# Altium PCB Legendre_SallenKey_PCB.PcbDoc
Units mm, origin at the board's own origin, x right, y up, seen from the top; angles counter-clockwise.
Board outline 37.57 x 49.43 mm, 2 copper layers (Top Layer, Bottom Layer); 33 components, 20 nets, 72 pads, 0 vias.
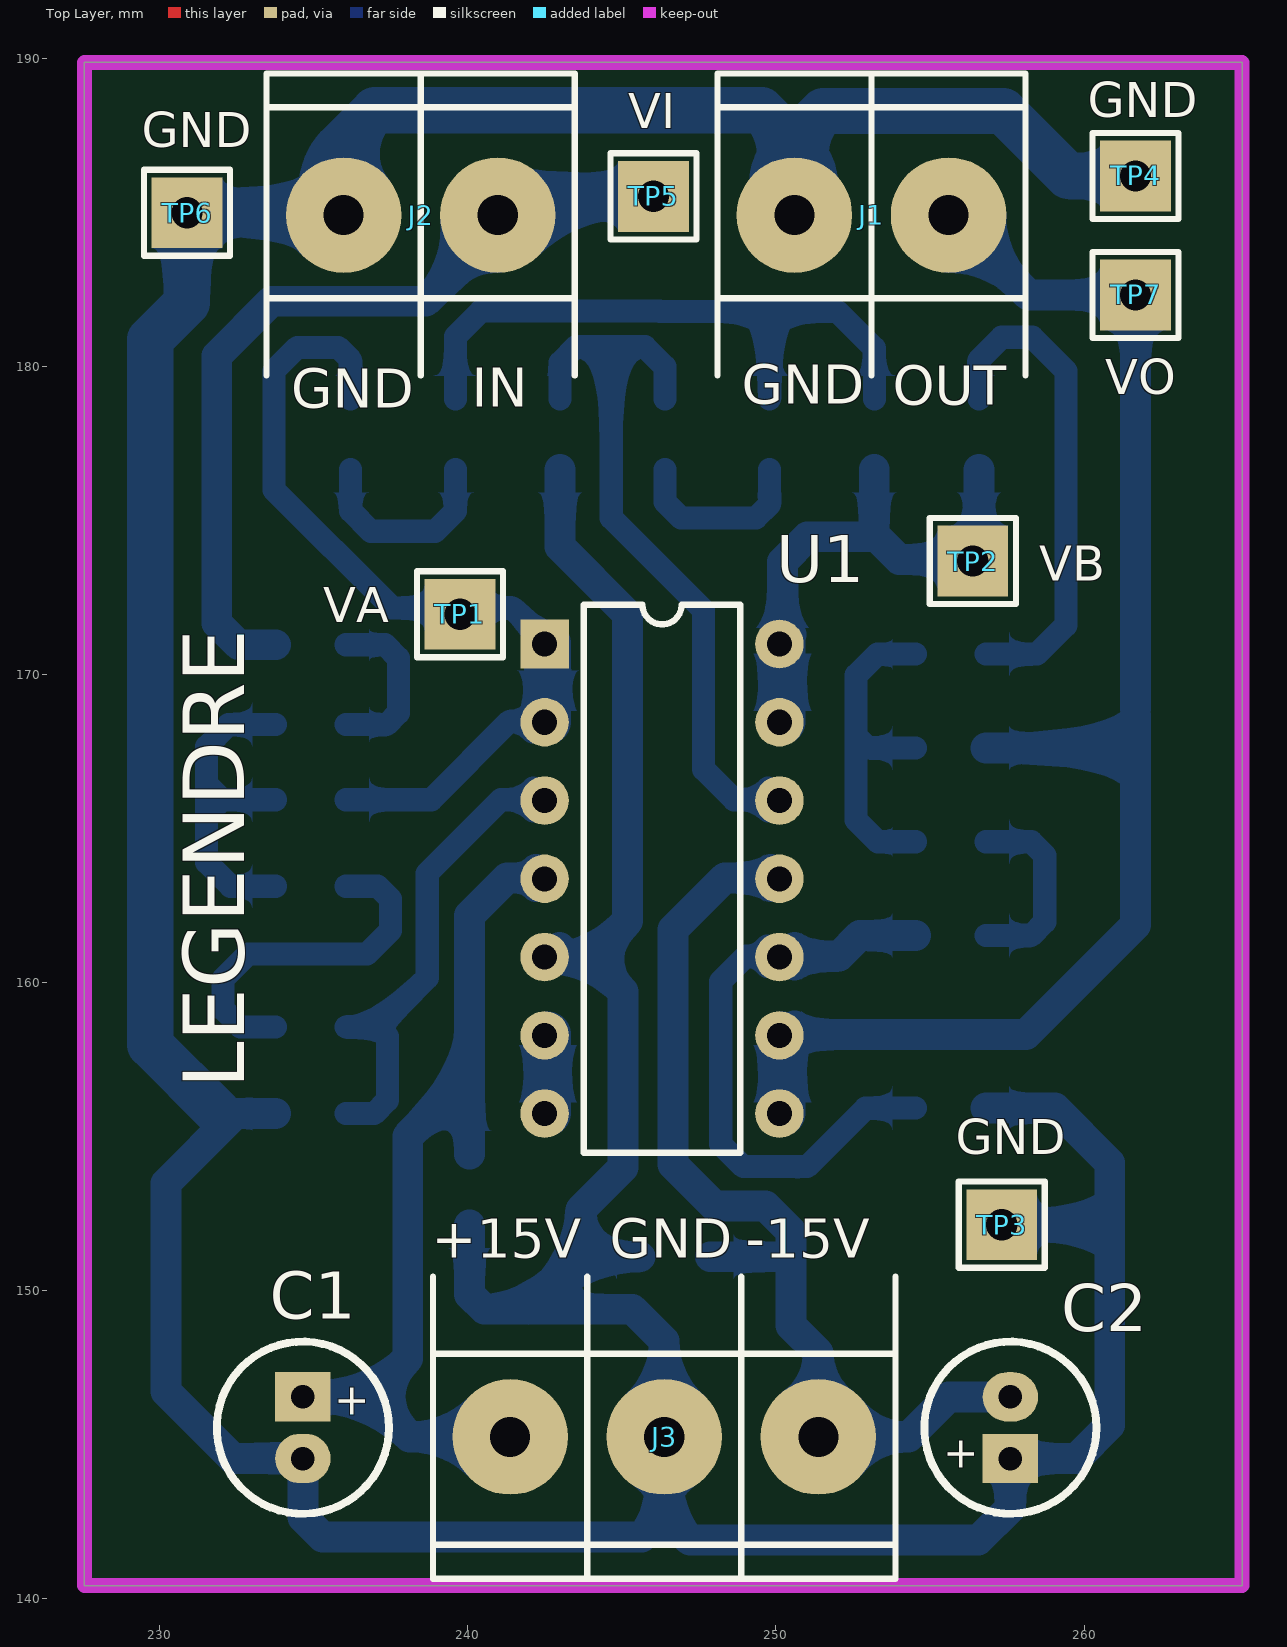
[diagram p0: Top Layer view]
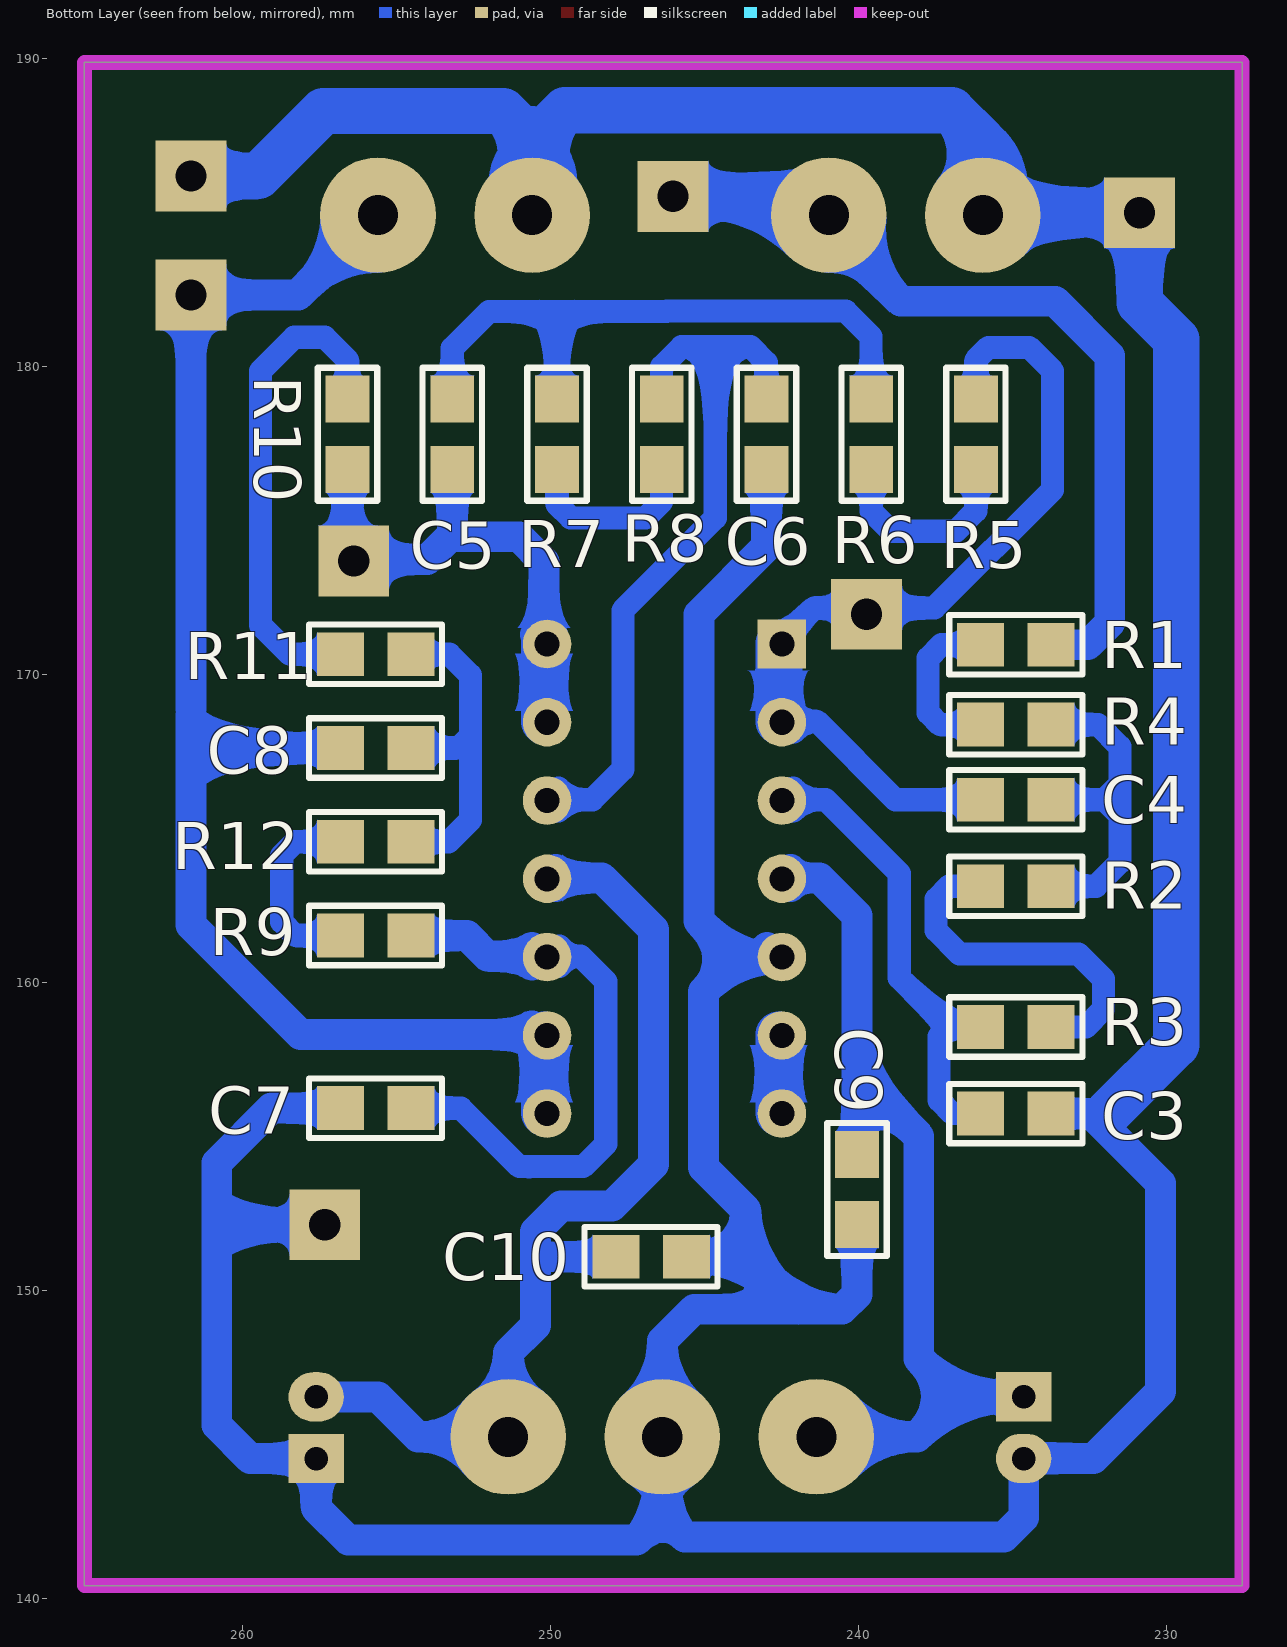
[diagram p1: Bottom Layer view, seen from below]
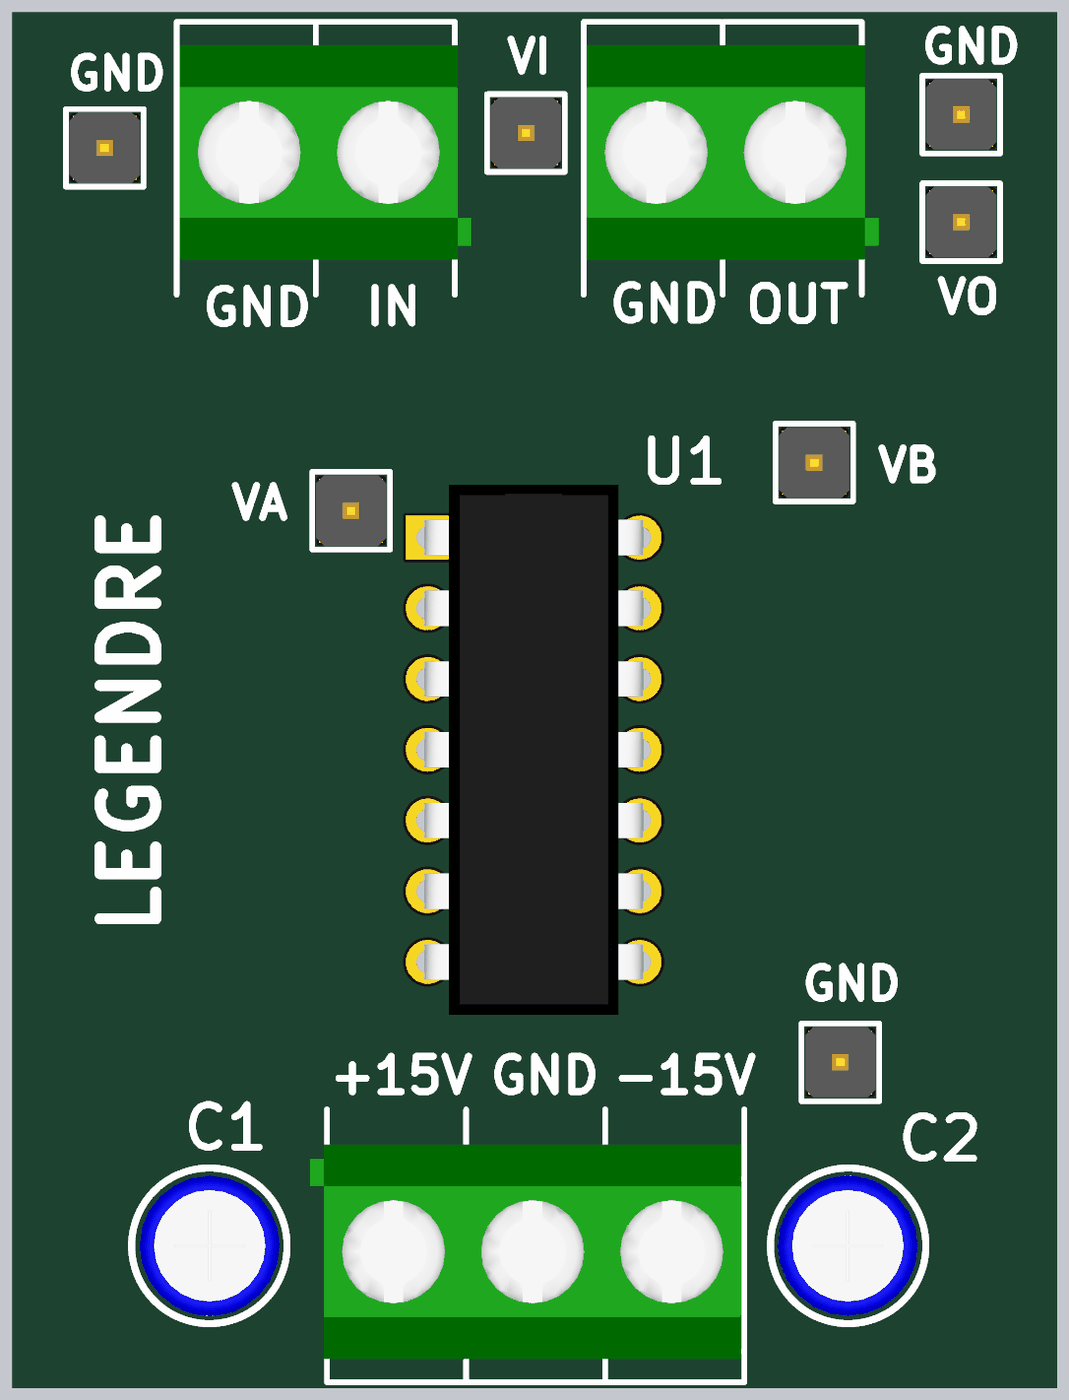
[diagram p2: 3D render of the assembled board from above, using the file's embedded part models]
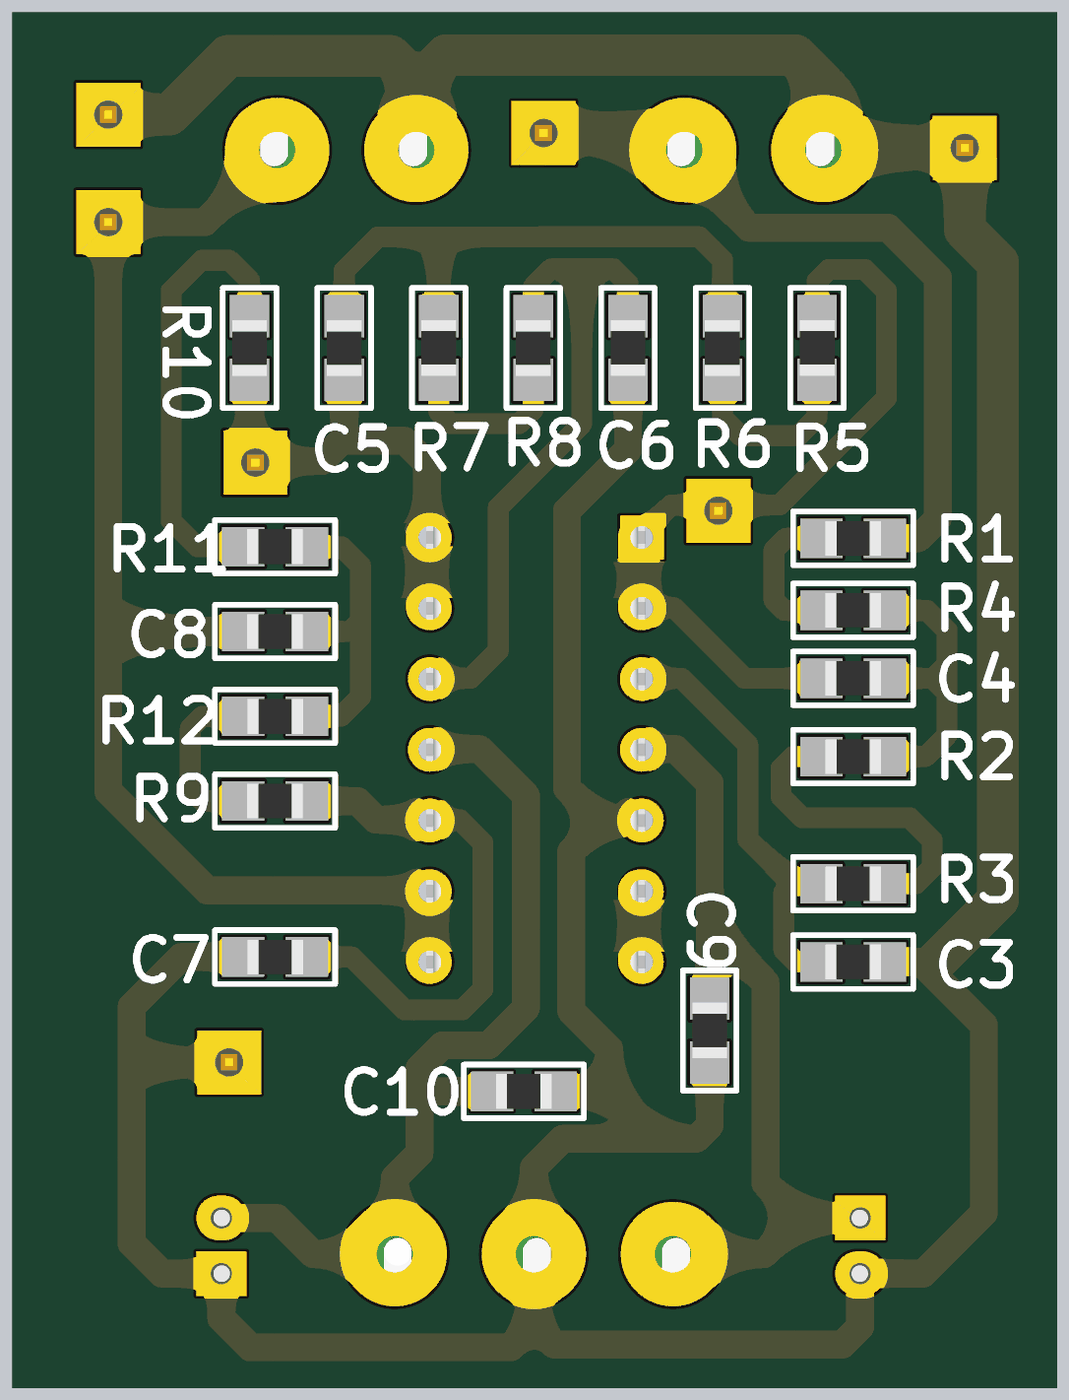
[diagram p3: 3D render of the assembled board from below, using the file's embedded part models]

## Layer stack, top to bottom
Top Solder: solder mask 0.0102, Solder Resist, Dk 3.5
Top Layer: signal copper 0.0356
Dielectric 1: dielectric 0.32, FR-4, Dk 4.8
Bottom Layer: signal copper 0.0356
Bottom Solder: solder mask 0.0102, Solder Resist, Dk 3.5

## Board outline
227.559,140.437 265.125,140.437 265.125,189.865 227.559,189.865

## Design rules (kind name [scope] priority, off if disabled: settings)
Clearance [All] p1: gap=0.4
PolygonConnect [All] p1: connectstyle=Relief reliefconductorwidth=0.254 reliefentries=4 polygonreliefangle="90 Angle" airgapwidth=0.254
RoutingVias [All] p1: holewidth=0.711 width=1.27 viastyle="Through Hole" minholewidth=0.711 minwidth=1.27 maxholewidth=0.711 maxwidth=1.27
SolderMaskExpansion [All] p1: expansion=0.102
Width [All] p1: maxlimit=1.5 minlimit=0.75 preferedwidth=1
30 further rules are at their usual default settings.

## Components (designator, comment, footprint, x,y, rotation, side; value= is the part's Value field where it differs from the comment)
C1 "10uF" CAP100RP 234.645,145.558 r270 top
C2 "10uF" CAP100RP 257.607,145.558 r90 top
C3 "CAP" 0805 234.899,155.753 r180 bottom
C4 "CAP" 0805 234.899,165.938 r180 bottom
C5 "CAP" 0805 253.191,177.8 r90 bottom
C6 "CAP" 0805 242.993,177.8 r270 bottom
C7 "CAP" 0805 255.676,155.931 r0 bottom
C8 "CAP" 0805 255.676,167.618 r180 bottom
C9 "100nF" 0805 240.055,153.289 r270 bottom
C10 "100nF" 0805 246.736,151.105 r180 bottom
J1 "BORNERA 2" BORNERA2 253.1,184.912 r270 top
J2 "BORNERA 2" BORNERA2 238.47,184.912 r270 top
J3 "BORNERA 3" BORNERA3 246.374,145.258 r90 top
R1 "RES" 0805 234.899,170.967 r0 bottom
R2 "RES" 0805 234.899,163.129 r0 bottom
R3 "RES" 0805 234.899,158.562 r0 bottom
R4 "RES" 0805 234.899,168.377 r180 bottom
R5 "RES" 0805 236.195,177.8 r270 bottom
R6 "RES" 0805 239.594,177.8 r90 bottom
R7 "RES" 0805 249.792,177.8 r270 bottom
R8 "RES" 0805 246.393,177.8 r90 bottom
R9 "RES" 0805 255.676,161.53 r180 bottom
R10 "RES" 0805 256.591,177.8 r90 bottom
R11 "RES" 0805 255.676,170.663 r180 bottom
R12 "RES" 0805 255.676,164.574 r0 bottom
TP1 "VA" TPTH 239.743,171.958 r90 top
TP2 "VB" TPTH 256.388,173.685 r90 top
TP3 "GND" TPTH 257.327,152.146 r90 top
TP4 "GND" TPTH 261.671,186.182 r90 top
TP5 "VI" TPTH 246.024,185.522 r90 top
TP6 "GND" TPTH 230.886,184.988 r90 top
TP7 "VO" TPTH 261.671,182.321 r90 top
U1 "TL084N" DIP14 242.494,170.993 r0 top

## Footprints (in the part's own frame and the unit in brackets; to place one, negate y for a bottom-side part, rotate by r counter-clockwise, add the part's x,y. Pads: shape width x height; smd on the part's side, far side on the other; paste and mask are expansions set on the pad)
0805 [mil] "Pasivo 0805"
  rect 60x56 smd: 1(-45,0) 2(45,0)
  silkscreen extent -85,-38 85,38, body extent -39,-25 39,25, height 15
BORNERA2 [mm] "Bornera con Tornillos 5mm separación"
  round 3.75 hole 1.3: 1(0,2.5) 2(0,-2.5)
  silkscreen extent -4.6,-5 5.2,5, body extent -3.76,-4.89 3.94,5.61, height 10
BORNERA3 [mm] "Bornera con Tornillos 5mm separación"
  round 3.75 hole 1.3: 1(0,5) 2(0,0) 3(0,-5)
  silkscreen extent -4.6,-7.5 5.2,7.5, body extent -3.76,-7.39 3.94,8.11, height 10.05
CAP100RP [mm] "Body diameter 5mm"
  rect 1.6x1.8 hole 0.762: 1(-1,0)
  oval 1.6x1.8 hole 0.762: 2(1,0)
  silkscreen extent -2.79,-2.79 2.79,2.79, body extent -2.53,-2.51 2.53,2.54, height 11.53
DIP14 [mil]
  rect 62x62 hole 32: 1(0,0)
  round 62 hole 32: 2(0,-100) 3(0,-200) 4(0,-300) 5(0,-400) 6(0,-500) 7(0,-600) 8(300,-600) 9(300,-500) 10(300,-400) 11(300,-300) 12(300,-200) 13(300,-100) 14(300,0)
  silkscreen extent 50,-650 250,50, body extent -5,-675 305,75, height 165
TPTH [mm]
  rect 2.3x2.3 hole 1.016: 1(0,0)
  silkscreen extent -1.4,-1.4 1.4,1.4, body extent -1.27,-1.27 1.27,1.27, height 6.04

## Part data
C1 C2: library part CAPPOL
C9 C10: library part CAP
TP1 TP2 TP3 TP4 TP5 TP6 TP7: library part TP
U1: "JFET-Input Operational Amplifier"

## Nets (pads, with @x,y where several pads share a name; then routed paths per layer and width w, separated by ;. In a path a pad name is that pad's centre, name@x,y a point inside that pad or via, vN(x,y) a via of type N, cw(c..) or ccw(c..) an arc to the next point about the centre after c; other vN are vias at no path point)
+VCC: C1.1 C9.1 J3.1 U1.4 | length 36.5
  Bottom Layer w1: C1.1 236.804,146.558 ; C9.1 240.055,157.023 ; J3.1@240.392,144.296 ccw(c238.104,142.057) 238.104,145.258 ; J3.1@240.392,146.22 cw(c238.104,148.459) 238.104,145.258 ; J3.1 238.104,145.258 ; U1.4@242.213,163.115 ccw(c241.53,162.433) 241.53,163.398 ccw(c241.53,164.364) U1.4@242.213,163.681 ; U1.4@242.595,163.398 241.275,163.398 240.055,162.179 240.055,157.023 ; 236.804,146.558 238.104,145.258 ; 236.804,146.558 238.049,147.803 238.049,155.016 240.055,157.023
-VCC: C2.2 C10.1 J3.3 U1.11 | length 42.6
  Bottom Layer w1: C10.1 250.409,151.105 250.485,151.028 ; U1.11@249.833,163.115 ccw(c249.15,162.433) 249.15,163.398 ccw(c249.15,164.364) U1.11@249.833,163.681 ; U1.11@250.215,163.398 248.336,163.398 246.659,161.722 246.659,154.102 248.006,152.756 249.657,152.756 250.485,151.927 250.485,151.028 ; J3.3@250.555,146.362 ccw(c249.348,147.99) 251.374,147.99 ; J3.3@252.193,146.362 cw(c253.4,147.99) 251.374,147.99 ; J3.3@252.433,144.381 cw(c254.3,142.833) 254.3,145.258 ; J3.3@252.433,146.135 ccw(c254.3,147.683) 254.3,145.258 ; C2.2 255.6,146.558 254.3,145.258 ; 250.485,151.028 250.485,148.879 251.374,147.99 ; 251.374,147.99 J3.3 254.3,145.258
GND: C1.2 C2.1 C3.2 C6.2 C7.2 C9.2 C10.2 J1.2 J2.2 J3.2 TP3.1 TP4.1 TP6.1 U1.5 | length 221.6
  Bottom Layer w0.75: 260.833,151.155 260.833,151.282 259.969,152.146 260.833,153.01 260.833,153.111
  Bottom Layer w1: 231.927,155.753 232.461,155.753 ; C3.2 232.461,155.753 ; C9.2 240.055,149.885 240.538,149.403 241.96,149.403 ; U1.5@242.367,160.985 242.57,160.782 243.967,160.782 ; U1.5@242.978,161.141 ccw(c243.845,162.008) 243.845,160.782 ; C6.2 242.993,174.151 245.186,171.958 245.186,162.001 243.967,160.782 ; J3.2@245.449,146.275 ccw(c243.547,148.367) 246.374,148.367 ; C10.2 243.662,151.105 ; J3.2@245.632,144.101 cw(c244.761,142.742) 246.374,142.742 ; J3.2@247.117,144.101 ccw(c247.988,142.742) 246.374,142.742 ; J3.2@247.299,146.275 cw(c249.201,148.367) 246.374,148.367 ; C7.2 259.055,155.931 260.833,154.153 260.833,153.111 ; TP3.1 259.969,152.146 260.807,152.146 260.833,152.171 ; 260.833,151.155 260.833,145.644 259.747,144.558 C2.1 257.607,142.951 256.565,141.91 247.207,141.91 246.374,142.742 ; 260.833,151.282 260.833,152.171 ; 260.833,153.01 260.833,152.171 ; 232.461,155.753 230.2,153.492 230.2,146.736 232.378,144.558 C1.2 234.645,142.646 235.28,142.011 245.643,142.011 246.374,142.742 ; 241.96,149.403 243.662,151.105 ; 241.96,149.403 245.339,149.403 246.374,148.367 ; 243.662,151.105 243.662,152.629 245.034,154 245.034,159.715 243.967,160.782 ; 246.374,142.742 J3.2 246.374,148.367
  Bottom Layer w1.5: 231.927,155.753 229.692,157.988 229.692,180.873 230.886,182.067 TP6.1 235.97,184.988 235.97,187.303 ; 233.07,184.988 cw(c233.07,182.012) J2.2@235.174,184.117 ; 233.438,184.988 ccw(c233.438,187.444) J2.2@235.174,185.707 ; J2.2@235.253,185.779 ccw(c233.991,187.303) 235.97,187.303 ; J2.2@235.679,184.676 cw(c237.108,185.837) 235.806,187.139 ; J2.2@236.687,185.779 cw(c237.949,187.303) 235.97,187.303 ; J2.2@236.843,185.621 cw(c238.406,186.891) 236.982,188.316 ; J1.2@249.708,185.597 ccw(c248.069,186.855) 249.53,188.316 ; J1.2@249.869,185.767 ccw(c248.512,187.354) 250.6,187.354 ; J1.2@250.318,184.665 cw(c251.692,185.866) 250.402,187.156 ; J1.2@250.6,185.522 250.6,187.354 ; 250.6,187.702 250.372,187.474 249.53,188.316 ; 250.739,187.106 cw(c249.437,185.804) J1.2@250.898,184.684 ; J1.2@251.331,185.767 cw(c252.688,187.354) 250.6,187.354 ; J1.2@251.447,185.652 cw(c252.903,186.924) 251.536,188.29 ; TP4.1 259.486,186.182 257.378,188.29 251.536,188.29 ; 235.97,187.303 236.982,188.316 ; 236.982,188.316 249.53,188.316 ; 250.6,187.354 251.536,188.29
NetC3_1: C3.1 R3.2 U1.3 | length 17.6
  Bottom Layer w0.75: C3.1 236.957,155.753 237.388,156.185 237.388,158.257 237.084,158.562 ; R3.2 237.084,158.562 ; U1.3@242.124,165.567 ccw(c241.228,164.671) 241.228,165.938 ccw(c241.228,167.206) U1.3@242.124,166.309 ; U1.3@242.595,165.938 241.071,165.938 238.684,163.551 238.684,160.162 237.084,158.562
NetC4_2: C4.2 R2.1 R4.2 | length 12.6
  Bottom Layer w0.75: R2.1 232.298,163.129 231.521,163.906 231.521,165.43 ; C4.2 232.029,165.938 ; R4.2 232.232,168.377 231.521,167.665 231.521,166.446 ; 231.521,165.43 232.029,165.938 ; 231.521,165.43 231.521,166.04 ; 231.521,166.04 231.623,165.938 232.029,165.938 ; 231.521,166.04 231.521,166.446 ; 231.521,166.446 232.029,165.938
NetC5_2: C5.2 R6.2 R7.1 | length 22.6
  Bottom Layer w0.75: R6.2 239.594,180.971 240.418,181.795 246.221,181.795 246.228,181.788 249.216,181.788 ; R7.1 249.792,181.212 ; C5.2 253.191,180.59 251.993,181.788 250.368,181.788 ; 249.216,181.788 249.792,181.212 ; 249.216,181.788 249.657,181.788 ; 249.657,181.788 249.792,181.652 249.792,181.212 ; 249.657,181.788 250.368,181.788 ; 249.792,181.212 250.368,181.788
NetC6_1: C6.1 R8.2 U1.12 | length 26
  Bottom Layer w0.75: C6.1 242.993,180.128 243.51,180.645 244.653,180.645 ; R8.2 246.393,179.997 245.745,180.645 244.653,180.645 ; U1.12@249.744,165.567 ccw(c248.848,164.671) 248.848,165.938 ccw(c248.848,167.206) U1.12@249.744,166.309 ; U1.12@250.215,165.938 248.641,165.938 247.65,166.929 247.65,172.085 244.653,175.082 244.653,180.645
NetC7_1: C7.1 R9.2 U1.10 | length 22.7
  Bottom Layer w0.75: U1.10@249.706,160.53 ccw(c249.022,159.981) 249.022,160.858 ; U1.10@249.706,161.187 cw(c249.022,161.735) 249.022,160.858 ; U1.10@250.215,160.858 249.022,160.858 ; 250.698,154.026 250.693,154.031 ; C7.1 252.908,155.931 251.008,154.031 250.693,154.031 ; 249.022,160.858 248.209,160.045 248.209,154.762 248.94,154.031 250.693,154.031
  Bottom Layer w1: U1.10@250.215,160.858 252.044,160.858 252.716,161.53 R9.2 ; U1.10@250.598,160.575 cw(c251.281,159.893) 251.281,160.858 cw(c251.281,161.824) U1.10@250.598,161.141
NetC8_2: C8.2 R11.2 R12.1 | length 11.2
  Bottom Layer w0.75: R12.1 253.307,164.574 252.603,165.278 252.603,167.996 ; C8.2 252.98,167.618 252.603,167.996 ; R11.2 253.289,170.663 252.603,169.977 252.603,167.996
NetR1_2: R1.2 R4.1 | length 5.5
  Bottom Layer w0.75: R4.1 237.363,168.377 237.744,168.758 237.744,170.536 237.312,170.967 R1.2
NetR2_2: R2.2 R3.1 | length 11.7
  Bottom Layer w0.75: R3.1 232.623,158.562 232.054,159.131 232.054,160.122 232.867,160.934 236.728,160.934 237.49,161.696 237.49,162.712 237.073,163.129 R2.2
NetR5_2: R5.2 R6.1 | length 6.6
  Bottom Layer w0.75: R5.2 236.195,175.311 236.855,174.65 238.938,174.65 239.594,175.307 R6.1
NetR7_2: R7.2 R8.1 | length 6
  Bottom Layer w0.75: R8.1 246.393,175.603 246.913,175.082 249.352,175.082 249.792,175.522 R7.2
NetR9_1: R9.1 R12.2 | length 6.3
  Bottom Layer w0.75: R9.1 258.279,161.53 258.724,161.976 258.724,164.135 258.285,164.574 R12.2
NetR10_2: R10.2 R11.1 | length 16.1
  Bottom Layer w0.75: R10.2 256.591,180.213 257.327,180.95 258.318,180.95 259.41,179.857 259.41,171.602 258.47,170.663 R11.1
NetU1_6: U1.6 U1.7 | length 2.5
  Bottom Layer w1.5: U1.7@242.595,155.778 U1.6@242.595,158.318
VA: C4.1 R5.1 TP1.1 U1.1 U1.2 | length 33.7
  Bottom Layer w0.75: C4.1 238.811,165.938 241.351,168.478 ; R5.1 236.195,180.213 235.788,180.619 234.467,180.619 233.705,179.857 233.705,175.997 237.541,172.161 241.452,172.161 U1.1@242.595,171.018 ; U1.2@242.097,168.136 ccw(c241.351,167.493) 241.351,168.478 ; U1.2@242.097,168.821 cw(c241.351,169.463) 241.351,168.478 ; U1.1@242.22,171.018 ccw(c241.315,171.018) 241.955,171.658 ccw(c242.595,172.299) U1.1@242.595,171.393 ; U1.2@242.33,168.213 ccw(c241.69,167.573) 241.69,168.478 ccw(c241.69,169.384) U1.2@242.33,168.743 ; U1.2@242.595,168.478 241.351,168.478
  Bottom Layer w1.5: U1.2@242.595,168.478 U1.1@242.595,171.018
VB: C5.1 R10.1 TP2.1 U1.13 U1.14 | length 18.4
  Bottom Layer w1: U1.14@249.933,171.301 ccw(c249.25,171.984) 250.215,171.984 ccw(c251.181,171.984) U1.14@250.498,171.301 ; U1.14@250.215,171.018 250.215,173.66 251.028,174.473 253.263,174.473 ; C5.1 253.191,174.545 253.263,174.473 ; R10.1 256.591,174.447 255.88,173.736 254,173.736 253.263,174.473
  Bottom Layer w1.5: U1.13@250.215,168.478 U1.14@250.215,171.018
VI: J2.1 R1.1 TP5.1 | length 36.2
  Bottom Layer w1: R1.1 232.562,170.967 231.851,171.679 231.851,180.34 233.629,182.118 238.633,182.118 ; 239.403,182.888 cw(c240.97,181.321) J2.1@240.97,183.537 ; J2.1@239.6,184.788 cw(c236.265,184.486) 238.633,182.118 ; J2.1@240.97,185.522 J2.1 240.97,184.455 238.633,182.118
  Bottom Layer w1.5: J2.1@240.97,185.522 TP5.1 ; J2.1@241.765,184.117 cw(c245.157,180.724) TP5.1@245.157,185.522
VO: C8.1 J1.1 TP7.1 U1.8 U1.9 | length 57.8
  Bottom Layer w0.75: 261.671,166.497 261.671,166.552 260.604,167.618 261.671,168.685 261.671,168.885
  Bottom Layer w1: U1.9@250.266,158.267 250.215,158.318 258.115,158.318 261.671,161.874 261.671,166.497 ; U1.9@250.598,158.035 cw(c251.281,157.353) 251.281,158.318 cw(c251.281,159.284) U1.9@250.598,158.601 ; J1.1@255.6,183.537 cw(c255.6,180.217) 257.947,182.565 cw(c260.295,184.912) J1.1@256.975,184.912 ; J1.1 258.191,182.321 TP7.1 261.671,168.885 ; C8.1 260.604,167.618 261.515,167.618 261.671,167.775 ; 261.671,166.552 261.671,167.775 ; 261.671,168.685 261.671,167.775
  Bottom Layer w1.5: U1.8@250.215,155.778 U1.9@250.215,158.318

## Keep-outs
Keep-Out Layer:
  the board outline again, w0.5

## Silkscreen, mask and mechanical layers (free items; w line width, h text height)
Top Overlay:
  text "GND" at 248.895,178.791 h1.27
  text "OUT" at 253.797,178.765 h1.27
  text "IN" at 240.132,178.689 h1.27
  text "GND" at 234.264,178.664 h1.27
  text "LEGENDRE" at 232.74,156.566 h2 r90
  text "+15V" at 238.836,151.079 h1.27
  text "GND" at 244.602,151.079 h1.27
  text "-15V" at 249.022,151.079 h1.27

## Text inside footprints (layer, text, board x,y; h text height)
C1: Top Overlay "+" at 235.814,147.006 h1.02 r270
C2: Top Overlay "+" at 256.438,144.11 h1.02 r90